# EAGLE board TreeShield (EAGLE 6.4)

Size 100 x 80 mm. Coordinates in mm from the lower left corner, seen from the top.
Outline: 0,0 100,0 100,80 0,80 0,0
Copper layers (1*16): Top 0.035mm / dielectric 1.5mm / Bottom 0.035mm
Design rules "default": minimum track width 10mil, minimum drill 24mil, track to track 8mil, track to pad 8mil, pad to pad 8mil, via to via 8mil, smd to smd 8mil, copper to edge 40mil, drill to drill 8mil, minimum pad ring 10mil, minimum via ring 8mil, stop-mask expansion 4mil, vias tented up to drill 0mil, thermal gap 10mil

## Footprints (pad centres in the part's own frame; a part is rotated, then mirrored left to right if it is on the bottom)
1X08-CLEANBIG = drill 1.016 pad 1.778 octagon: 1 -8.89,0; 2 -6.35,0; 3 -3.81,0; 4 -1.27,0; 5 1.27,0; 6 3.81,0; 7 6.35,0; 8 8.89,0
TO220 = drill 1.118 long: 1 -2.54,-6.35; 2 0,-6.35; 3 2.54,-6.35
SO14 = smd 0.66 x 2.032: 1 -3.81,-3.073; 2 -2.54,-3.073; 3 -1.27,-3.073; 4 0,-3.073; 5 1.27,-3.073; 6 2.54,-3.073; 7 3.81,-3.073; 8 3.81,3.073; 9 2.54,3.073; 10 1.27,3.073; 11 0,3.073; 12 -1.27,3.073; 13 -2.54,3.073; 14 -3.81,3.073
R0603 = smd 1 x 1.1: 1 -0.85,0; 2 0.85,0
TB6560AHQ = drill 0.7 pad 1.016 octagon: CLK -6.35,-1; CW/CCW 5.08,-1; DCY1 7.62,-1; DCY2 6.985,1; ENABLE -5.715,1; M1 6.35,-1; M2 5.715,1; MO 2.54,-1; NFA 0.635,1; NFB -1.27,-1; OSC -3.81,-1; OUT_AM 0,-1; OUT_AP 1.905,1; OUT_BM -2.54,-1; OUT_BP -0.635,1; PGNDA 1.27,-1; PGNDB -1.905,1; PROTECT 3.81,-1; RESET'' -5.08,-1; SGND -4.445,1; TQ1 -6.985,1; TQ2 -7.62,-1; VDD 4.445,1; VMA 3.175,1; VMB -3.175,1
C0603 = smd 1.1 x 1: 1 -0.85,0; 2 0.85,0
0603-RES = smd 1.1 x 1: 1 -0.85,0; 2 0.85,0
P0817V = drill 1.016 octagon: 1 -5.08,0; 2 1.27,0
1X10-BIG = drill 1.016 pad 1.778 octagon: 1 -11.43,0; 2 -8.89,0; 3 -6.35,0; 4 -3.81,0; 5 -1.27,0; 6 1.27,0; 7 3.81,0; 8 6.35,0; 9 8.89,0; 10 11.43,0
ARDUINOR3-BPLACE = drill 1 pad 1.676 octagon: 3V 35.56,2.54; 5V 38.1,2.54; A0 50.8,2.54; A1 53.34,2.54; A2 55.88,2.54; A3 58.42,2.54; A4 60.96,2.54; A5 63.5,2.54; AREF 23.876,50.8; D0 63.5,50.8; D1 60.96,50.8; D2 58.42,50.8; D3 55.88,50.8; D4 53.34,50.8; D5 50.8,50.8; D6 48.26,50.8; D7 45.72,50.8; D8 41.656,50.8; D9 39.116,50.8; D10 36.576,50.8; D11 34.036,50.8; D12 31.496,50.8; D13 28.956,50.8; GND 26.416,50.8; GND1 43.18,2.54; GND2 40.64,2.54; IOREF 30.48,2.54; RESERVED 27.94,2.54; RESET 33.02,2.54; SCL 18.796,50.8; SDA 21.336,50.8; VIN 45.72,2.54
DMN5L06DMK = smd 0.635 x 1.27: D1 0.95,-1.2; D2 -0.95,1.2; G1 0,1.2; G2 0,-1.2; S1 0.95,1.2; S2 -0.95,-1.2

## Placement (x,y rotation side)
D8D13  [1X08-CLEANBIG]  46.99,64.77 0 top
IC1  LM1117T-5.0  [TO220]  7.62,8.89 0 top
IC2  74HC164D  [SO14]  12.7,72.39 0 top
MO_PU1  1k  [R0603]  69.85,55.88 0 top
MO_PU2  1k  [R0603]  72.39,31.75 0 top
MOTOR1  TB6560AHQ  [TB6560AHQ]  63.5,52.07 90 top
MOTOR2  TB6560AHQ  [TB6560AHQ]  64.77,29.21 90 top
MOTOR_IN  [1X08-CLEANBIG]  68.58,64.77 0 top
MOTOR_OUT  [1X08-CLEANBIG]  45.72,40.64 270 top
OSC_CAP1  100p  [C0603]  69.85,48.26 0 top
OSC_CAP2  100p  [C0603]  72.39,25.4 0 top
PR_PU1  1k  [R0603]  69.85,58.42 0 top
PR_PU2  1k  [R0603]  72.39,34.29 0 top
R1  [0603-RES]  22.86,57.15 0 top
R2  [0603-RES]  31.75,62.23 0 top
R3  [0603-RES]  26.67,62.23 0 top
R4  [0603-RES]  20.32,62.23 0 top
R5  [0603-RES]  11.43,58.42 0 top
R6  [0603-RES]  19.05,60.96 0 top
R7  [0603-RES]  13.97,59.69 0 top
R8  [0603-RES]  19.05,62.23 0 top
R9  [0603-RES]  11.43,64.77 0 top
R10  [0603-RES]  12.7,64.77 0 top
R11  [0603-RES]  68.58,64.77 0 top
R12  [0603-RES]  73.66,76.2 0 top
R13  [0603-RES]  6.35,62.23 0 top
R14  [0603-RES]  57.15,77.47 0 top
R15  [0603-RES]  64.77,76.2 0 top
R16  [0603-RES]  48.26,71.12 0 top
R17  [0603-RES]  25.4,66.04 0 top
R18  [0603-RES]  3.81,68.58 0 top
R19  [0603-RES]  48.26,71.12 0 top
R20  [0603-RES]  36.83,74.93 0 top
R21  [0603-RES]  19.05,68.58 0 top
R22  [0603-RES]  10.16,71.12 0 top
R23  [0603-RES]  62.23,69.85 0 top
R24  [0603-RES]  34.29,73.66 0 top
R25  [0603-RES]  17.78,64.77 0 top
R26  [0603-RES]  22.86,68.58 0 top
R27  [0603-RES]  13.97,69.85 0 top
R28  [0603-RES]  15.24,69.85 0 top
R29  [0603-RES]  74.93,72.39 0 top
R30  [0603-RES]  2.54,74.93 0 top
R31  [0603-RES]  20.32,77.47 0 top
R32  [0603-RES]  54.61,73.66 0 top
R33  [0603-RES]  31.75,76.2 0 top
R34  [0603-RES]  12.7,76.2 0 top
R35  [0603-RES]  15.24,72.39 0 top
R36  [0603-RES]  53.34,67.31 0 top
R37  [0603-RES]  36.83,73.66 0 top
R38  [0603-RES]  41.91,68.58 0 top
R39  [0603-RES]  20.32,71.12 0 top
R40  [0603-RES]  27.94,59.69 0 top
RNFA1  0.4  [P0817V]  57.15,52.07 0 top
RNFA2  0.4  [P0817V]  58.42,29.21 0 top
RNFB1  0.4  [P0817V]  71.12,52.07 180 top
RNFB2  0.4  [P0817V]  72.39,29.21 180 top
STAGE12GND  PINHD-1X10  [1X10-BIG]  17.78,41.91 0 top
STAGE12PWR  PINHD-1X10  [1X10-BIG]  20.32,45.72 0 top
STAGE34GND  PINHD-1X10  [1X10-BIG]  16.51,48.26 0 top
STAGE34PWR  PINHD-1X10  [1X10-BIG]  15.24,3.81 0 top
STAGE56GND  PINHD-1X10  [1X10-BIG]  15.24,31.75 0 top
STAGE56PWR  PINHD-1X10  [1X10-BIG]  13.97,39.37 0 top
STAGE78GND  PINHD-1X10  [1X10-BIG]  15.24,52.07 0 top
STAGE78PWR  PINHD-1X10  [1X10-BIG]  15.24,46.99 0 top
U1  ARDUINOR3-BPLACE  [ARDUINOR3-BPLACE]  13.97,13.97 0 top
U$1  DMN5L06DMK  [DMN5L06DMK]  10.16,62.23 0 top
U$2  DMN5L06DMK  [DMN5L06DMK]  26.67,72.39 0 top
U$3  DMN5L06DMK  [DMN5L06DMK]  25.4,71.12 0 top
U$4  DMN5L06DMK  [DMN5L06DMK]  45.72,76.2 0 top

## Library data of the parts
D8D13 MO_PU1 MO_PU2 MOTOR_IN MOTOR_OUT OSC_CAP1 OSC_CAP2 PR_PU1 PR_PU2 STAGE12GND STAGE12PWR STAGE34GND STAGE34PWR STAGE56GND STAGE56PWR STAGE78GND STAGE78PWR U1 = adafruit
IC1 = lm1117
IC2 = CD74ACT164M
MOTOR1 MOTOR2 = TB6560AHQ
R1-R40 = SparkFun-Resistors
RNFA1 RNFA2 RNFB1 RNFB2 = resistor
U$1-U$4 = DMN5L06DMK

## Nets
3V: U1.3V
5V: U1.5V
CLK1: MOTOR1.CLK MOTOR_IN.4
CW1: MOTOR1.CW/CCW MOTOR_IN.1
EN1: MOTOR1.ENABLE MOTOR_IN.3
GND: IC1.1 IC2.7 MOTOR1.DCY1 MOTOR1.DCY2 MOTOR1.M1 MOTOR1.M2 MOTOR1.PGNDA MOTOR1.PGNDB MOTOR1.SGND MOTOR1.TQ1 MOTOR1.TQ2 MOTOR2.DCY1 MOTOR2.DCY2 MOTOR2.M1 MOTOR2.M2 MOTOR2.PGNDA MOTOR2.PGNDB MOTOR2.SGND MOTOR2.TQ1 MOTOR2.TQ2 OSC_CAP1.1 OSC_CAP2.1 RNFA1.2 RNFA2.2 RNFB1.2 RNFB2.2 STAGE34GND.1 STAGE34GND.2 STAGE34GND.3 STAGE34GND.4 STAGE34GND.5 STAGE34GND.6 STAGE34GND.7 STAGE34GND.8 STAGE34GND.9 STAGE34GND.10 STAGE56GND.1 STAGE56GND.2 STAGE56GND.3 STAGE56GND.4 STAGE56GND.5 STAGE56GND.6 STAGE56GND.7 STAGE56GND.8 STAGE56GND.9 STAGE56GND.10 STAGE78GND.1 STAGE78GND.2 STAGE78GND.3 STAGE78GND.4 STAGE78GND.5 STAGE78GND.6 STAGE78GND.7 STAGE78GND.8 STAGE78GND.9 STAGE78GND.10 U1.GND U$1.D1 U$1.D2 U$2.D1 U$2.D2 U$3.D1 U$3.D2 U$4.D1 U$4.D2
GND1: U1.GND1
GND2: U1.GND2
N$2: D8D13.1 IC2.1
N$3: D8D13.2 IC2.2
N$4: MOTOR1.NFA RNFA1.1
N$5: MO_PU1.1 MOTOR1.MO
N$6: MOTOR1.PROTECT PR_PU1.1
N$7: MOTOR1.OSC OSC_CAP1.2
N$8: R1.2 STAGE12PWR.1
N$9: R2.2 STAGE12PWR.2
N$10: MOTOR1.NFB RNFB1.1
N$11: MOTOR2.CW/CCW MOTOR_IN.5
N$12: MOTOR2.RESET'' MOTOR_IN.6
N$13: MOTOR2.ENABLE MOTOR_IN.7
N$14: MOTOR2.CLK MOTOR_IN.8
N$15: MOTOR2.NFB RNFB2.1
N$16: MOTOR2.NFA RNFA2.1
N$17: MO_PU2.1 MOTOR2.MO
N$18: MOTOR2.OSC OSC_CAP2.2
N$19: MOTOR2.PROTECT PR_PU2.1
N$20: R3.2 STAGE12PWR.3
N$21: R4.2 STAGE12PWR.4
N$22: R5.2 STAGE12PWR.5
N$23: R6.2 STAGE12PWR.6
N$24: R7.2 STAGE12PWR.7
N$25: R8.2 STAGE12PWR.8
N$26: D8D13.3 IC2.8
N$27: D8D13.4 IC2.9
N$28: IC2.3 U$2.G1
N$29: IC2.4 U$2.G2
N$30: IC2.5 U$1.G1
N$31: IC2.6 U$1.G2
N$32: R9.2 STAGE12PWR.9
N$33: R10.2 STAGE12PWR.10
N$34: R1.1 R2.1 R3.1 R4.1 R5.1 U$2.S1
N$35: R6.1 R7.1 R8.1 R9.1 R10.1 U$2.S2
N$36: R11.2 STAGE34PWR.1
N$37: R12.2 STAGE34PWR.2
N$38: R13.2 STAGE34PWR.3
N$39: R14.2 STAGE34PWR.4
N$40: R15.2 STAGE34PWR.5
N$41: R16.2 STAGE34PWR.6
N$42: R17.2 STAGE34PWR.7
N$43: R18.2 STAGE34PWR.8
N$44: R19.2 STAGE34PWR.9
N$45: R20.2 STAGE34PWR.10
N$46: R21.2 STAGE56PWR.1
N$47: R22.2 STAGE56PWR.2
N$48: R23.2 STAGE56PWR.3
N$49: R24.2 STAGE56PWR.4
N$50: R25.2 STAGE56PWR.5
N$51: R26.2 STAGE56PWR.6
N$52: R27.2 STAGE56PWR.7
N$53: R28.2 STAGE56PWR.8
N$54: R29.2 STAGE56PWR.9
N$55: R30.2 STAGE56PWR.10
N$56: R31.2 STAGE78PWR.1
N$57: R32.2 STAGE78PWR.2
N$58: R33.2 STAGE78PWR.3
N$59: R34.2 STAGE78PWR.4
N$60: R35.2 STAGE78PWR.5
N$61: R36.2 STAGE78PWR.6
N$62: R37.2 STAGE78PWR.7
N$63: R38.2 STAGE78PWR.8
N$64: R39.2 STAGE78PWR.9
N$65: R40.2 STAGE78PWR.10
N$66: R11.1 R12.1 R13.1 R14.1 R15.1 U$1.S1
N$67: IC2.13 U$3.G2
N$68: IC2.12 U$3.G1
N$69: IC2.11 U$4.G2
N$70: IC2.10 U$4.G1
N$71: R16.1 R17.1 R18.1 R19.1 R20.1 U$1.S2
N$72: R21.1 R22.1 R23.1 R24.1 R25.1 U$4.S1
N$73: R26.1 R27.1 R28.1 R29.1 R30.1 U$4.S2
N$74: R31.1 R32.1 R33.1 R34.1 R35.1 U$3.S1
N$75: R36.1 R37.1 R38.1 R39.1 R40.1 U$3.S2
N$76: STAGE12GND.1 STAGE12GND.2 STAGE12GND.3 STAGE12GND.4 STAGE12GND.5 STAGE12GND.6 STAGE12GND.7 STAGE12GND.8 STAGE12GND.9 STAGE12GND.10
OUT_AM1: MOTOR1.OUT_AM MOTOR_OUT.3
OUT_AM2: MOTOR2.OUT_AM MOTOR_OUT.7
OUT_AP1: MOTOR1.OUT_AP MOTOR_OUT.4
OUT_AP2: MOTOR2.OUT_AP MOTOR_OUT.8
OUT_BM1: MOTOR1.OUT_BM MOTOR_OUT.1
OUT_BM2: MOTOR2.OUT_BM MOTOR_OUT.5
OUT_BP1: MOTOR1.OUT_BP MOTOR_OUT.2
OUT_BP2: MOTOR2.OUT_BP MOTOR_OUT.6
RESET1: MOTOR1.RESET'' MOTOR_IN.2
VCC: IC1.2 IC2.14 MO_PU1.2 MO_PU2.2 MOTOR1.VDD MOTOR2.VDD PR_PU1.2 PR_PU2.2
VDD: IC1.3 MOTOR1.VMA MOTOR1.VMB MOTOR2.VMA MOTOR2.VMB
VIN: U1.VIN

## Tracks (layer width: path | path; a pad name or v marks a point on that pad's centre or on a via)
CLK1  (1 unrouted)
CW1  (1 unrouted)
EN1  (1 unrouted)
GND  (64 unrouted)
N$2  (1 unrouted)
N$3  (1 unrouted)
N$4  (1 unrouted)
N$5  (1 unrouted)
N$6  (1 unrouted)
N$7  (1 unrouted)
N$8  (1 unrouted)
N$9  (1 unrouted)
N$10  (1 unrouted)
N$11  (1 unrouted)
N$12  (1 unrouted)
N$13  (1 unrouted)
N$14  (1 unrouted)
N$15  (1 unrouted)
N$16  (1 unrouted)
N$17  (1 unrouted)
N$18  (1 unrouted)
N$19  (1 unrouted)
N$20  (1 unrouted)
N$21  (1 unrouted)
N$22  (1 unrouted)
N$23  (1 unrouted)
N$24  (1 unrouted)
N$25  (1 unrouted)
N$26  (1 unrouted)
N$27  (1 unrouted)
N$28  (1 unrouted)
N$29  (1 unrouted)
N$30  (1 unrouted)
N$31  (1 unrouted)
N$32  (1 unrouted)
N$33  (1 unrouted)
N$34  (5 unrouted)
N$35  (5 unrouted)
N$36  (1 unrouted)
N$37  (1 unrouted)
N$38  (1 unrouted)
N$39  (1 unrouted)
N$40  (1 unrouted)
N$41  (1 unrouted)
N$42  (1 unrouted)
N$43  (1 unrouted)
N$44  (1 unrouted)
N$45  (1 unrouted)
N$46  (1 unrouted)
N$47  (1 unrouted)
N$48  (1 unrouted)
N$49  (1 unrouted)
N$50  (1 unrouted)
N$51  (1 unrouted)
N$52  (1 unrouted)
N$53  (1 unrouted)
N$54  (1 unrouted)
N$55  (1 unrouted)
N$56  (1 unrouted)
N$57  (1 unrouted)
N$58  (1 unrouted)
N$59  (1 unrouted)
N$60  (1 unrouted)
N$61  (1 unrouted)
N$62  (1 unrouted)
N$63  (1 unrouted)
N$64  (1 unrouted)
N$65  (1 unrouted)
N$66  (5 unrouted)
N$67  (1 unrouted)
N$68  (1 unrouted)
N$69  (1 unrouted)
N$70  (1 unrouted)
N$71  (5 unrouted)
N$72  (5 unrouted)
N$73  (5 unrouted)
N$74  (5 unrouted)
N$75  (5 unrouted)
N$76  (9 unrouted)
OUT_AM1  (1 unrouted)
OUT_AM2  (1 unrouted)
OUT_AP1  (1 unrouted)
OUT_AP2  (1 unrouted)
OUT_BM1  (1 unrouted)
OUT_BM2  (1 unrouted)
OUT_BP1  (1 unrouted)
OUT_BP2  (1 unrouted)
RESET1  (1 unrouted)
VCC  (7 unrouted)
VDD  (4 unrouted)